# Altium PCB VNH2SP30 Test.PcbDoc
Units mm, origin at the board's own origin, x right, y up, seen from the top; angles counter-clockwise.
Board outline 55.75 x 64.26 mm, 2 copper layers (Top Layer, Bottom Layer); 15 components, 15 nets, 62 pads, 0 vias.
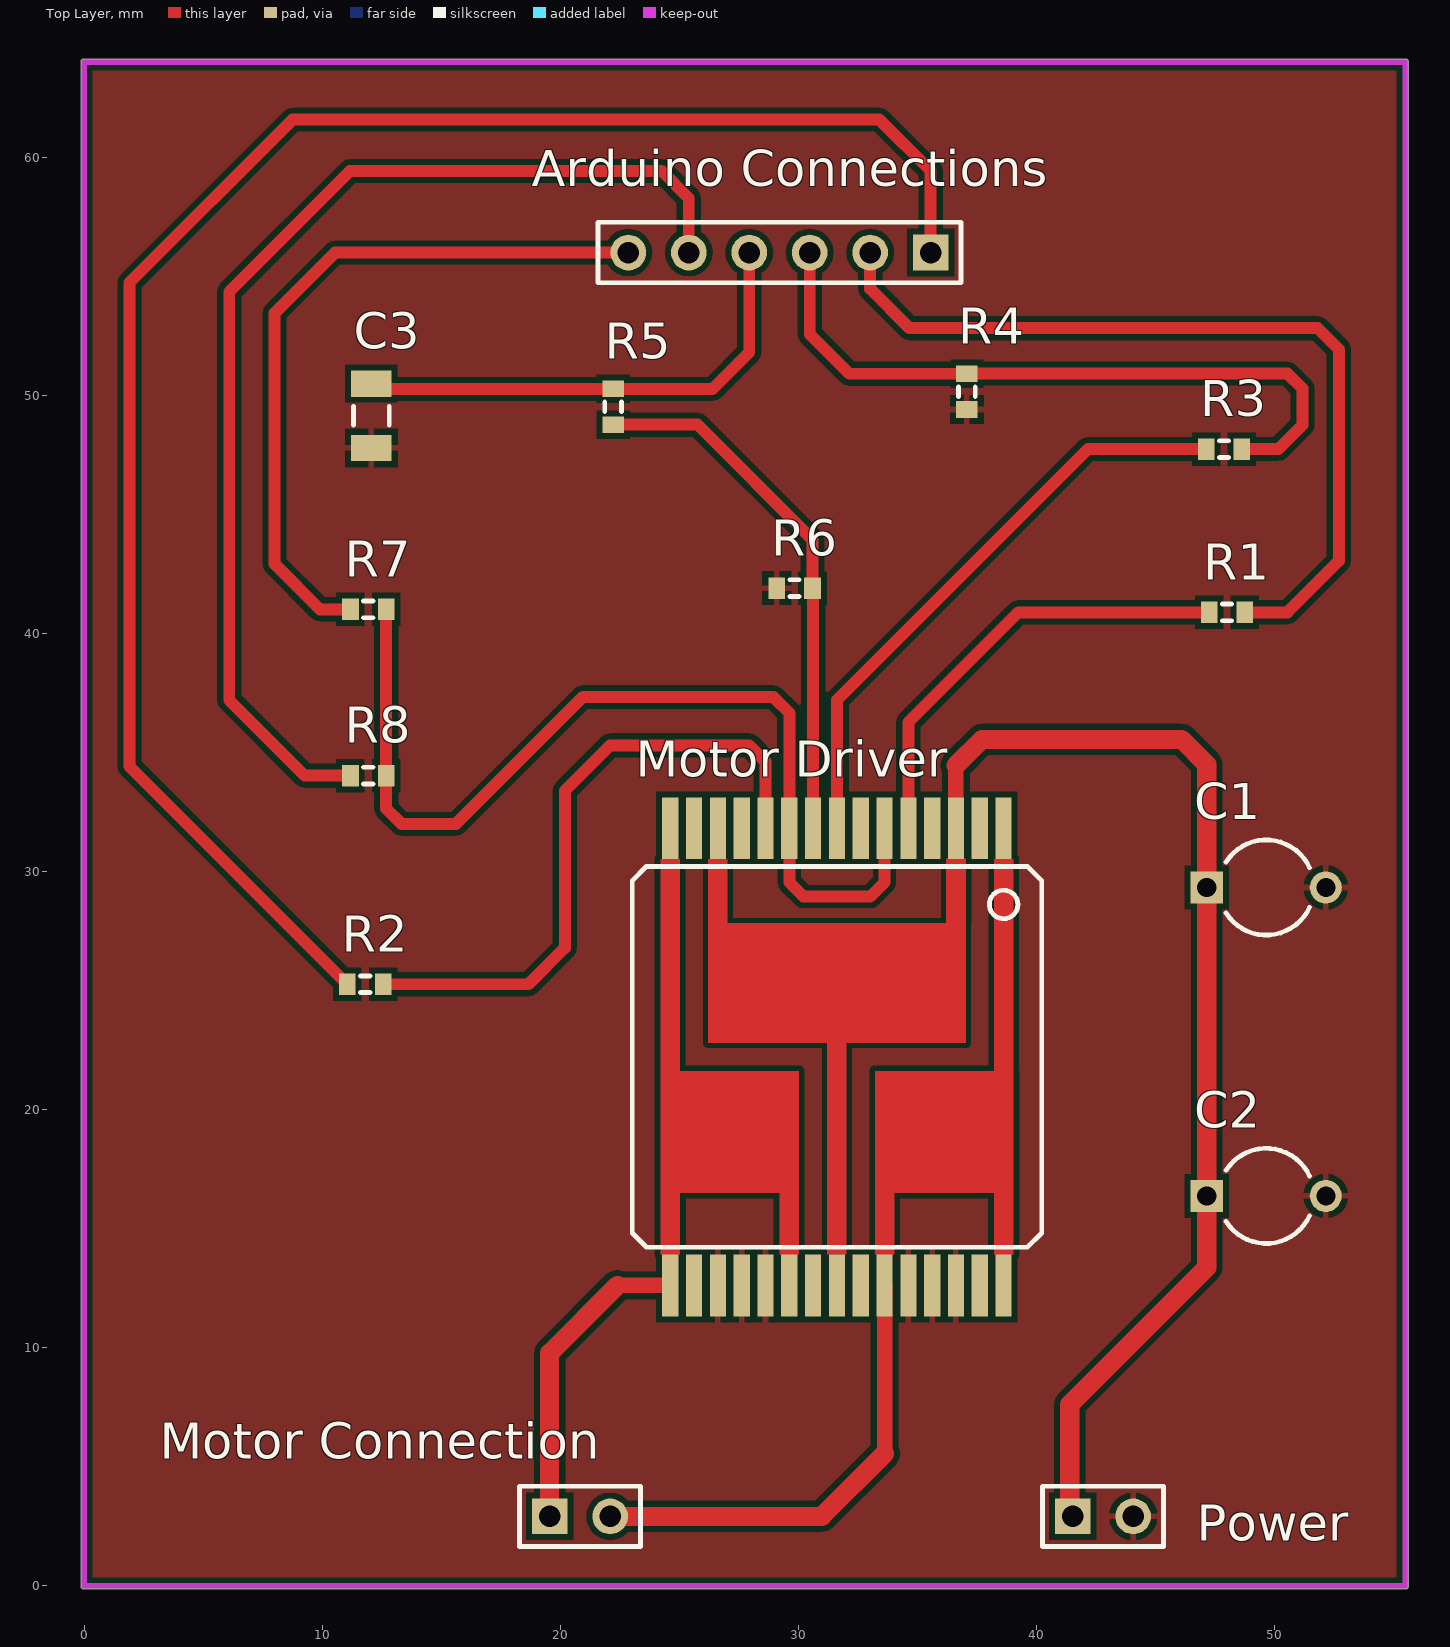
[diagram p0: Top Layer view]
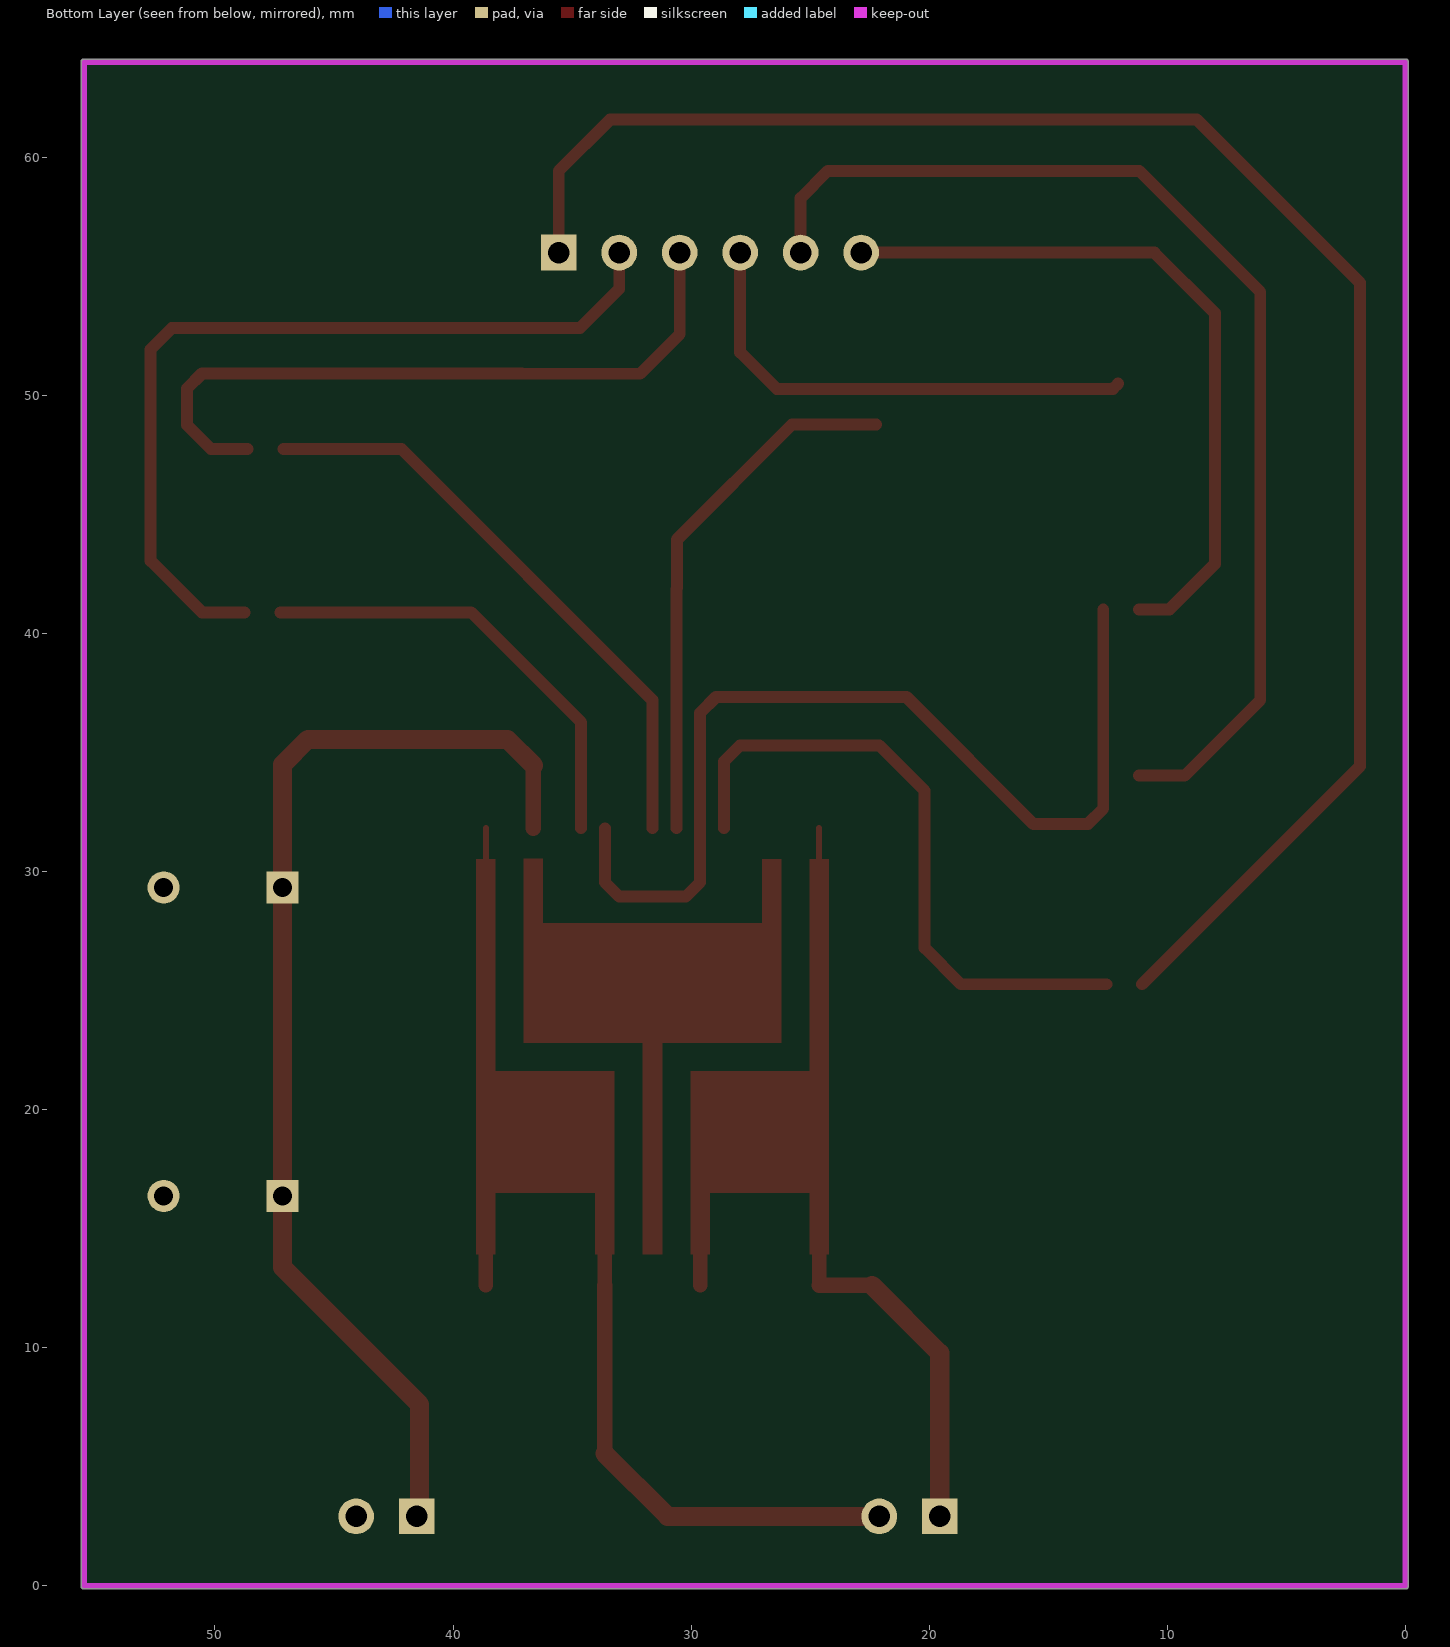
[diagram p1: Bottom Layer view, seen from below]

## Layer stack, top to bottom
Top Solder: solder mask 0.0102, Solder Resist, Dk 3.5
Top Layer: signal copper 0.0356
Dielectric 1: dielectric 0.32, FR-4, Dk 4.8
Bottom Layer: signal copper 0.0356
Bottom Solder: solder mask 0.0102, Solder Resist, Dk 3.5

## Board outline
0,-0.127 cw(c0,0) -0.127,0 -0.127,64.008 cw(c0,64.008) 0,64.135 55.499,64.135 cw(c55.499,64.008) 55.626,64.008 55.626,0 cw(c55.499,0) 55.499,-0.127

## Design rules (kind name [scope] priority, off if disabled: settings)
Clearance [All] p1: gap=0.24 ignorepadtopadclearanceinfootprint=FALSE except(0: Arc-Hole Track-Hole SMDPad-Hole THPad-Hole Via-Hole Fill-Hole Poly-Hole Region-Hole Text-Hole)
PolygonConnect [All] p1: connectstyle=Relief reliefconductorwidth=0.254 reliefentries=4 polygonreliefangle="90 Angle" airgapwidth=0.254
RoutingVias [All] p1: holewidth=0.711 width=1.27 viastyle="Through Hole" minholewidth=0.711 minwidth=1.27 maxholewidth=0.711 maxwidth=1.27
SolderMaskExpansion [All] p1: expansion=0.102
Width [All] p1: maxlimit=4 minlimit=0.254 preferedwidth=0.5 minimp=50.000000 maximp=50.000000 favimp=50.000000
30 further rules are at their usual default settings.

## Components (designator, comment, footprint, x,y, rotation, side; value= is the part's Value field where it differs from the comment)
"Arduino Connections" "Pin Header" HDR1X6 35.56,56.007 r180 top
C1 "Cap2" CAPR5-4X5 49.657,29.337 r0 top value=1500uF
C2 "Cap2" CAPR5-4X5 49.657,16.383 r0 top value=DNP
C3 "Cap Semi" C1206 12.065,49.149 r90 top value=33nF
"Motor Connection" "Header 2" HDR1X2 19.558,2.921 r0 top
"Motor Driver" "VNH2SP30-E" MULTIPOWER30_VNH2SP30(Primary) 31.623,22.225 r180 top
Power "Header 2" HDR1X2 41.529,2.921 r0 top
R1 "Res3" J1-0603 48.006,40.894 r180 top value=1K
R2 "Res3" J1-0603 11.811,25.273 r0 top value=1K
R3 "Res3" J1-0603 47.879,47.752 r180 top value=1K
R4 "Res3" J1-0603 37.084,50.165 r90 top value=1K
R5 "Res3" J1-0603 22.225,49.53 r90 top value=10K
R6 "Res3" J1-0603 29.845,41.91 r0 top value=1.5K
R7 "Res3" J1-0603 11.938,41.021 r180 top value=4.7K
R8 "Res3" J1-0603 11.938,34.036 r180 top value=1K

## Footprints (in the part's own frame and the unit in brackets; to place one, negate y for a bottom-side part, rotate by r counter-clockwise, add the part's x,y. Pads: shape width x height; smd on the part's side, far side on the other; paste and mask are expansions set on the pad)
C1206 [mm] "Chip Capacitor, Body 3.2x1.6mm, IPC High Density"
  rect 1.1x1.7 smd: 1(-1.35,0) 2(1.35,0)
  silkscreen extent -0.4,-0.75 0.4,0.75, body extent -1.7,-0.9 1.7,0.9, height 1.3
CAPR5-4X5 [mm] "Capacitor; 2 Leads"
  rect 1.35x1.35 hole 0.8: 1(-2.5,0)
  round 1.35 hole 0.8: 2(2.5,0)
  silkscreen extent -1.69,-2 1.82,2
HDR1X2 [mm] "Connector; Header; 2 Position"
  rect 1.5x1.5 hole 0.9: 1(0,0)
  round 1.5 hole 0.9: 2(2.54,0)
  silkscreen extent -1.27,-1.27 3.81,1.27
HDR1X6 [mm] "Connector; Header; 6 Position"
  rect 1.5x1.5 hole 0.9: 1(0,0)
  round 1.5 hole 0.9: 2(2.54,0) 3(5.08,0) 4(7.62,0) 5(10.16,0) 6(12.7,0)
  silkscreen extent -1.27,-1.27 13.97,1.27
J1-0603 [mm] "Chip Resistor, Body 1.6x0.8mm, IPC High Density"
  rect 0.7x0.9 smd: 1(-0.75,0) 2(0.75,0)
  silkscreen extent -0.2,-0.35 0.2,0.35, body extent -0.85,-0.48 0.85,0.48, height 0.9
MULTIPOWER30_VNH2SP30(Primary) [mm]
  rect 0.68x2.6 smd: P$1(-7,-9.6) P$2(-6,-9.6) P$3(-5,-9.6) P$4(-4,-9.6) P$5(-3,-9.6) P$6(-2,-9.6) P$7(-1,-9.6) P$8(0,-9.6) P$9(1,-9.6) P$10(2,-9.6) P$11(3,-9.6) P$12(4,-9.6) P$13(5,-9.6) P$14(6,-9.6) P$15(7,-9.6) P$16(7,9.6) P$17(6,9.6) P$18(5,9.6) P$19(4,9.6) P$20(3,9.6) P$21(2,9.6) P$22(1,9.6) P$23(0,9.6) P$24(-1,9.6) P$25(-2,9.6) P$26(-3,9.6) P$27(-4,9.6) P$28(-5,9.6) P$29(-6,9.6) P$30(-7,9.6)
  Top Layer region: -5.41,-5.6 -4.6,-5.6 -4.6,-8.316 -5.41,-8.316
  Top Layer region: 4.602,-5.6 5.4,-5.6 5.4,-8.304 4.602,-8.304
  Top Layer region: -0.4,8.3 0.4,8.3 0.4,-0.601 -0.4,-0.601
  Top Layer region: -2.4,8.3 -1.6,8.3 -1.6,5.701 -2.4,5.701
  Top Layer region: 1.601,8.3 2.4,8.3 2.4,5.703 1.601,5.703
  Top Layer region: 6.602,8.3 7.4,8.3 7.4,5.702 6.602,5.702
  Top Layer region: -7.405,8.3 -6.6,8.3 -6.6,5.704 -7.405,5.704
  Top Layer region: 6.6,0.6 7.4,0.6 7.4,-8.3 6.6,-8.3
  Top Layer region: -7.402,0.6 -6.6,0.6 -6.6,-8.303 -7.402,-8.303
  Top Layer region: -7.413,5.7 -1.6,5.7 -1.6,0.601 -7.413,0.601
  Top Layer region: 1.603,5.7 7.4,5.7 7.4,0.601 1.603,0.601
  Top Layer region: -5.405,-0.6 5.4,-0.6 5.4,-5.605 -5.405,-5.605
  silkscreen extent -8.6,-8 8.6,8

## Part data
"Arduino Connections": library part "Header 6", "Header, 6-Pin", LatestRevisionDate=17-Jul-2002, LatestRevisionNote="Re-released for DXP Platform.", Publisher="Altium Limited"
C1 C2: "Capacitor", PackageDescription="Capacitor; 2 Leads", PackageReference=CAPR5-4X5, Published=23-Sep-2002, Publisher="Altium Limited"
C3: "Capacitor (Semiconductor SIM Model)", LatestRevisionDate=29-May-2009, LatestRevisionNote="IPC-7351 Footprint Added.", PackageDescription="Chip Capacitor", PackageReference=C1206, Published=8-Jun-2000, Publisher="Altium Limited"
"Motor Connection" Power: "Header, 2-Pin", LatestRevisionDate=17-Jul-2002, LatestRevisionNote="Re-released for DXP Platform.", Publisher="Altium Limited"
"Motor Driver": library part VNH2SP30, "Dip18", Package="DIP-18 STMicroelectronics", Availability=Unavailable, MF=STMicroelectronics, MP=VNH2SP30, Price=None, SnapEDA_Link=https://www.snapeda.com/parts/VNH2SP30/STMicroelectronics/view-part/?ref=snap
R1 R2 R3 R4 R5 R6 R7 R8: "Resistor", LatestRevisionDate=29-May-2009, LatestRevisionNote="IPC-7351 Footprint Added.", PackageDescription="Chip Resistor", PackageReference=J1-0603, Published=8-Jun-2000, Publisher="Altium Limited"

## Nets (pads, with @x,y where several pads share a name; then routed paths per layer and width w, separated by ;. In a path a pad name is that pad's centre, name@x,y a point inside that pad or via, vN(x,y) a via of type N, cw(c..) or ccw(c..) an arc to the next point about the centre after c; other vN are vias at no path point)
5V: "Arduino Connections.6" R7.2 | length 30.4
  Top Layer w0.5: R7.2 9.906,41.021 8.001,42.926 8.001,53.467 10.541,56.007 22.86,56.007
CS: "Motor Driver.P$9" R5.1 R6.2 | length 22.5
  Top Layer w0.5: R5.1 25.769,48.78 30.595,43.954 R6.2 30.623,41.882 30.623,31.825
CS_ARDUINO: "Arduino Connections.4" C3.2 R5.2 | length 20.8
  Top Layer w0.5: C3.2 12.284,50.28 R5.2 26.404,50.28 27.94,51.816 27.94,56.007
EN: "Motor Driver.P$6" "Motor Driver.P$10" R7.1 R8.1 | length 41.9
  Top Layer w0.5: R7.1 R8.1 12.688,32.651 13.335,32.004 15.621,32.004 20.955,37.338 28.956,37.338 29.623,36.671 29.623,31.825 29.623,29.559 30.226,28.956 33.02,28.956 33.623,29.559 33.623,31.825
EN_ARDUINO: "Arduino Connections.5" R8.2 | length 47.7
  Top Layer w0.5: R8.2 9.271,34.036 6.096,37.211 6.096,54.356 11.176,59.436 24.257,59.436 25.4,58.293 25.4,56.007
GND: "Motor Driver.P$18" "Motor Driver.P$19" "Motor Driver.P$20" "Motor Driver.P$26" "Motor Driver.P$27" "Motor Driver.P$28" C1.2 C2.2 C3.1 Power.2 R4.1 R6.1
IN_A: "Motor Driver.P$5" R1.2 | length 19
  Top Layer w0.5: 34.623,31.825 34.623,36.274 39.243,40.894 R1.2
IN_A_ARDUINO: "Arduino Connections.2" R1.1 | length 36
  Top Layer w0.5: 33.02,56.007 33.02,54.483 34.671,52.832 51.816,52.832 52.705,51.943 52.705,43.053 50.546,40.894 R1.1
IN_B: "Motor Driver.P$11" R2.2 | length 27.2
  Top Layer w0.5: R2.2 18.669,25.273 20.193,26.797 20.193,33.401 22.098,35.306 27.94,35.306 28.623,34.623 28.623,31.825
IN_B_ARDUINO: "Arduino Connections.1" R2.1 | length 74.1
  Top Layer w0.5: R2.1 1.905,34.429 1.905,54.737 8.763,61.595 33.401,61.595 35.56,59.436 35.56,56.007
OUT_A: "Motor Connection.2" "Motor Driver.P$1" "Motor Driver.P$25" "Motor Driver.P$30" | length 42.8
  Top Layer w0.254: 38.623,16.637 38.623,31.825
  Top Layer w0.6: 33.623,12.625 33.623,16.524 ; 38.623,12.625 38.623,16.637
  Top Layer w0.65: 33.623,5.556 33.623,12.625
  Top Layer w0.8: 22.098,2.921 30.988,2.921 33.623,5.556
OUT_B: "Motor Connection.1" "Motor Driver.P$15" "Motor Driver.P$16" "Motor Driver.P$21" | length 36.2
  Top Layer w0.254: 24.623,16.523 24.623,31.825
  Top Layer w0.6: 24.623,12.625 24.623,16.523 ; 29.623,12.625 29.623,16.521
  Top Layer w0.65: 22.404,12.625 24.623,12.625
  Top Layer w0.8: 19.558,2.921 19.558,9.779 22.404,12.625
PWM: "Motor Driver.P$8" R3.2 | length 25.3
  Top Layer w0.5: 31.623,31.825 31.623,37.211 42.164,47.752 R3.2
PWM_ARDUINO: "Arduino Connections.3" R3.1 R4.2 | length 29.6
  Top Layer w0.5: 30.48,56.007 30.48,52.578 32.143,50.915 R4.2 37.096,50.927 50.546,50.927 51.181,50.292 51.181,48.768 50.165,47.752 R3.1
VCC: "Motor Driver.P$3" "Motor Driver.P$13" "Motor Driver.P$23" C1.1 C2.1 Power.1 | length 48.1
  Top Layer w0.5: Power.1@41.402,3.048 Power.1
  Top Layer w0.65: 36.623,31.825 36.623,34.464
  Top Layer w0.8: 36.623,34.464 37.719,35.56 46.101,35.56 47.157,34.504 C1.1 C2.1 47.157,13.375 41.402,7.62 Power.1@41.402,3.048
pads on no net: "Motor Driver.P$2" "Motor Driver.P$4" "Motor Driver.P$7" "Motor Driver.P$12" "Motor Driver.P$14" "Motor Driver.P$17" "Motor Driver.P$22" "Motor Driver.P$24" "Motor Driver.P$29"

## Polygon pours and split planes (outlines as drawn)
GND on Top Layer "GND Plane" (solid, pour order 2): 0,64.008 55.499,64.008 55.499,0 0,0

## Keep-outs
Keep-Out Layer:
  lines w0.254: 0,0 0,64.008 55.499,64.008 55.499,0 0,0